# Altium PCB sedraPasaAltos.PcbDoc
Units mm, origin at the board's own origin, x right, y up, seen from the top; angles counter-clockwise.
Board outline 100.08 x 50 mm, 2 copper layers (Top Layer, Bottom Layer); 37 components, 24 nets, 93 pads, 9 vias.
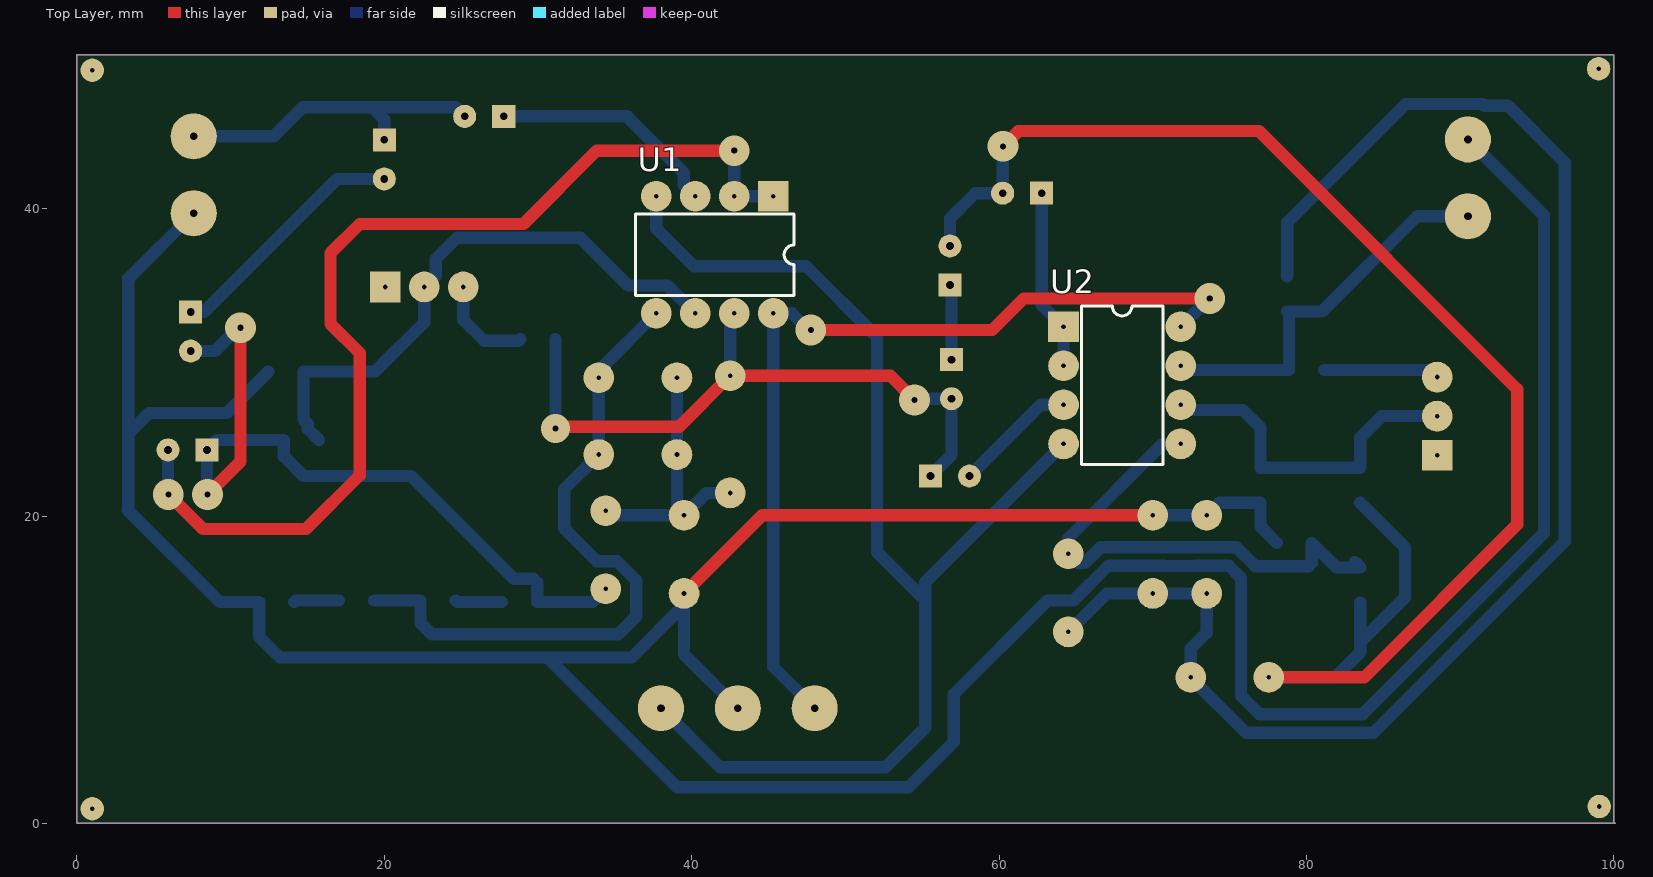
[diagram p0: Top Layer view]
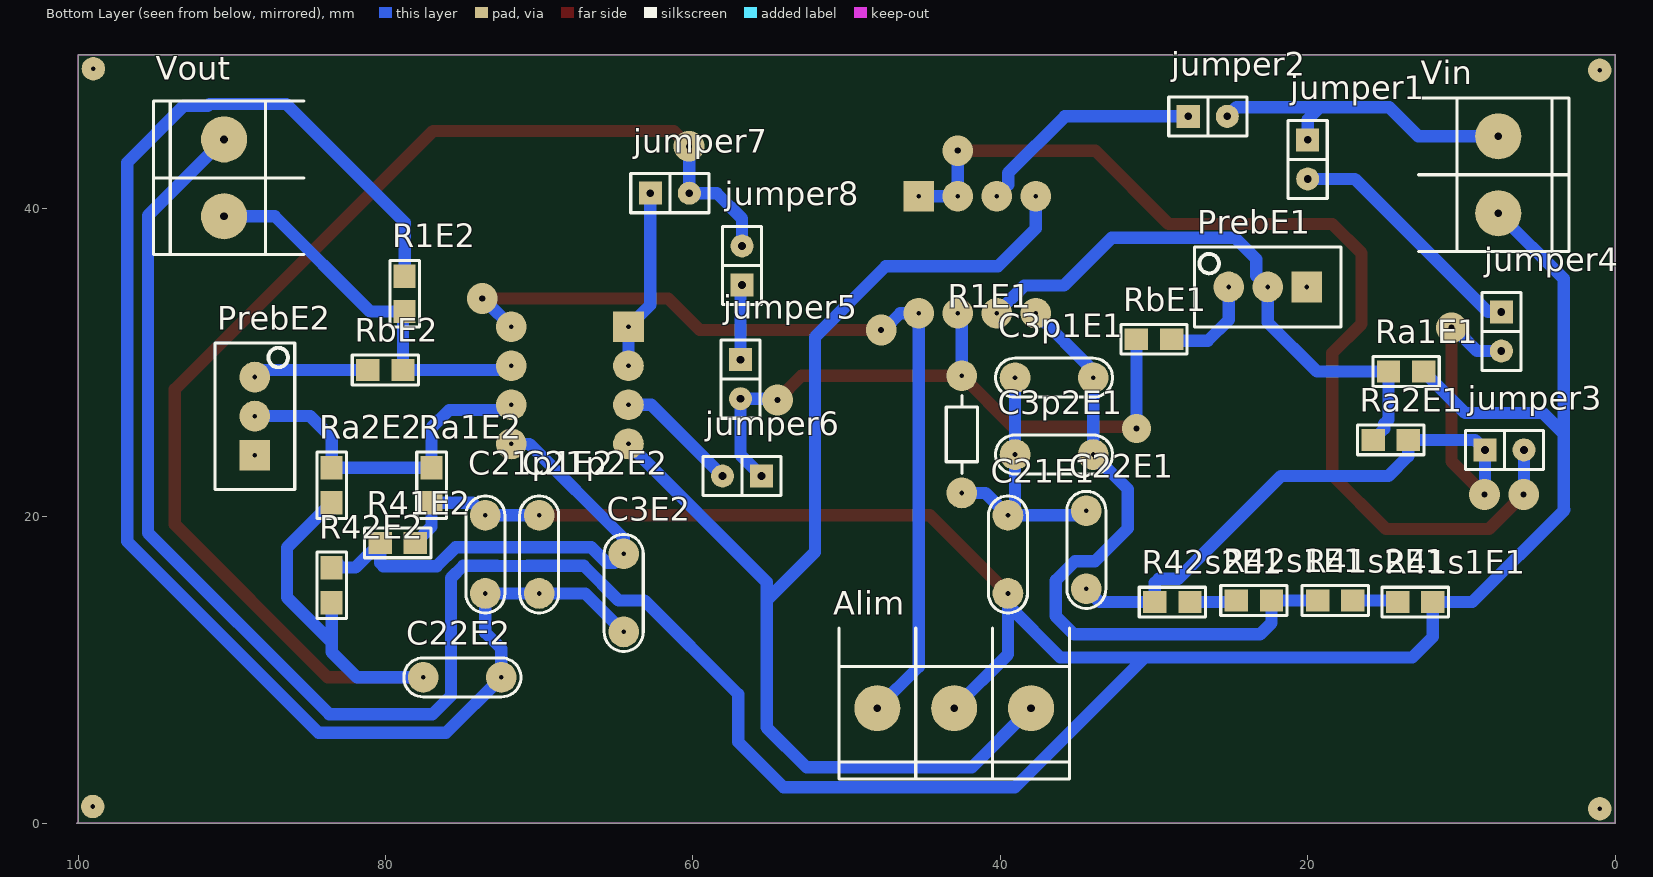
[diagram p1: Bottom Layer view, seen from below]
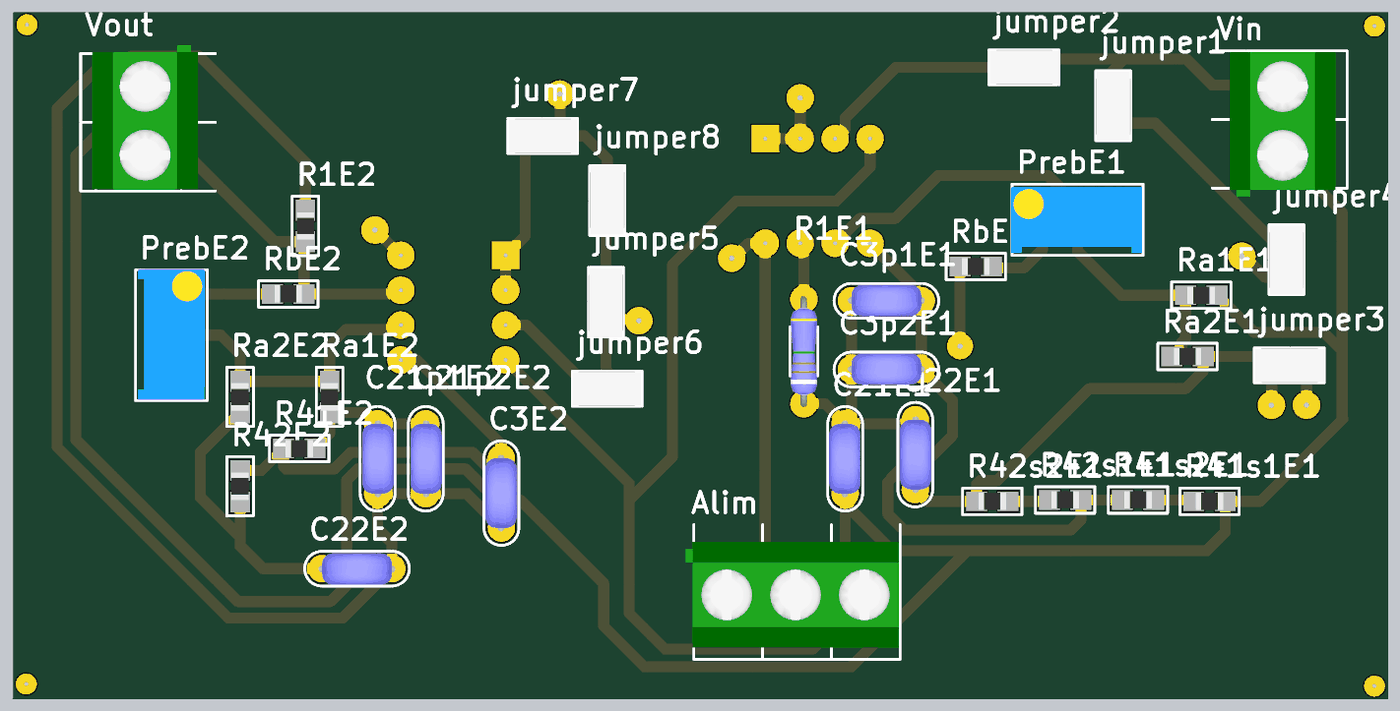
[diagram p2: 3D render of the assembled board from below, using the file's embedded part models]

## Layer stack, top to bottom
Top Solder: solder mask 0.0102, Solder Resist, Dk 3.5
Top Layer: signal copper 0.0356
Dielectric 1: dielectric 0.32, FR-4, Dk 4.8
Bottom Layer: signal copper 0.0356
Bottom Solder: solder mask 0.0102, Solder Resist, Dk 3.5

## Board outline
100.076,0 100,0.076 100,50 0,50 0,0

## Design rules (kind name [scope] priority, off if disabled: settings)
Clearance [All] p1: gap=0.4 ignorepadtopadclearanceinfootprint=FALSE
PolygonConnect [All] p1: connectstyle=Relief reliefconductorwidth=0.254 reliefentries=4 polygonreliefangle="90 Angle" airgapwidth=0.254
RoutingVias [All] p1: holewidth=0.4 width=1.9 viastyle="Through Hole" minholewidth=0.3 minwidth=1 maxholewidth=0.5 maxwidth=2
SolderMaskExpansion [All] p1: expansion=0.102
Width [All] p1: maxlimit=0.9 minlimit=0.75 preferedwidth=0.8
30 further rules are at their usual default settings.

## Classes and differential pairs
component class sedraPasaAltos: Alim C3E2 C3p1E1 C3p2E1 C21E1 C21p1E2 C21p2E2 C22E1 C22E2 jumper1 jumper2 jumper3 jumper4 jumper5 jumper6 jumper7 jumper8 PrebE1 PrebE2 R1E1 R1E2 R41E2 R41s1E1 R41s2E1 R42E2 R42s1E1 R42s2E1 Ra1E1 Ra1E2 Ra2E1 Ra2E2 RbE1 RbE2 Vin Vout

## Components (designator, comment, footprint, x,y, rotation, side; value= is the part's Value field where it differs from the comment)
Alim "BORNERA 3" BORNERA3 43,7.5 r90 bottom
C3E2 "CAP" CAP200 64.5,15 r270 bottom
C3p1E1 "CAP" CAP200 36.5,29 r0 bottom
C3p2E1 "CAP" CAP200 36.5,24 r0 bottom
C21E1 "CAP" CAP200 39.5,17.5 r270 bottom
C21p1E2 "CAP" CAP200 73.5,17.5 r90 bottom
C21p2E2 "CAP" CAP200 70,17.5 r90 bottom
C22E1 "CAP" CAP200 34.4,17.8 r90 bottom
C22E2 "CAP" CAP200 75,9.5 r180 bottom
jumper1 "JUMPER" JUMPER2 20,43.2 r270 bottom
jumper2 "JUMPER" JUMPER2 26.5,46 r180 bottom
jumper3 "JUMPER" JUMPER2 7.2,24.3 r180 bottom
jumper4 "JUMPER" JUMPER2 7.4,32 r270 bottom
jumper5 "JUMPER" JUMPER2 56.9,28.9 r270 bottom
jumper6 "JUMPER" JUMPER2 56.8,22.6 r0 bottom
jumper7 "JUMPER" JUMPER2 61.5,41 r180 bottom
jumper8 "JUMPER" JUMPER2 56.8,36.3 r90 bottom
PrebE1 "PRESET" "PRESET V" 22.6,34.9 r0 bottom
PrebE2 "PRESET" "PRESET V" 88.5,26.5 r90 bottom
R1E1 "RES" RES300 42.5,21.5 r90 bottom
R1E2 "RES" 0805 78.75,34.45 r270 bottom
R41E2 "RES" 0805 79.2,18.25 r0 bottom
R41s1E1 "RES" 0805 13,14.4 r0 bottom
R41s2E1 "RES" 0805 18.2,14.5 r0 bottom
R42E2 "RES" 0805 83.5,15.5 r90 bottom
R42s1E1 "RES" 0805 23.5,14.5 r180 bottom
R42s2E1 "RES" 0805 28.8,14.4 r180 bottom
Ra1E1 "RES" 0805 13.6,29.4 r0 bottom
Ra1E2 "RES" 0805 77,22 r90 bottom
Ra2E1 "RES" 0805 14.6,24.95 r0 bottom
Ra2E2 "RES" 0805 83.5,22 r90 bottom
RbE1 "RES" 0805 30,31.5 r0 bottom
RbE2 "RES" 0805 80,29.5 r180 bottom
U1 "TL082JG" JG008 41.5,37 r180 top
U2 "TL082JG" JG008 68,28.5 r270 top
Vin "BORNERA 2" BORNERA2 7.6,42.2 r0 bottom
Vout "BORNERA 2" BORNERA2 90.5,42 r180 bottom

## Footprints (in the part's own frame and the unit in brackets; to place one, negate y for a bottom-side part, rotate by r counter-clockwise, add the part's x,y. Pads: shape width x height; smd on the part's side, far side on the other; paste and mask are expansions set on the pad)
0805 [mil] "Pasivo 0805"
  rect 60x56 smd: 1(-45,0) 2(45,0)
  silkscreen extent -85,-38 85,38, body extent -40,-24 39,25, height 15
BORNERA2 [mm] "Bornera con Tornillos 5mm separación"
  round 3 / inner round 3.75 / far side round 3 hole 0.5: 1(0,2.5) 2(0,-2.5)
  silkscreen extent -4.6,-5 5.2,5, body extent -3.76,-4.89 3.94,5.61, height 10
BORNERA3 [mm] "Bornera con Tornillos 5mm separación"
  round 3 / inner round 3.75 / far side round 3 hole 0.5: 1(0,5) 2(0,0) 3(0,-5)
  silkscreen extent -4.6,-7.5 5.2,7.5, body extent -3.76,-7.39 3.94,8.11, height 10.05
CAP200 [mm]
  round 2 hole 0.3: 1(-2.54,0) 2(2.54,0)
  silkscreen extent -3.81,-1.27 3.81,1.27, body extent -2.79,-1.17 2.79,1.12, height 6.24
JG008 [mm] "DIP; 8 Leads; Row Spacing 7.62 mm; Pitch 2.54 mm"
  rect 2x2 hole 0.3: 1(-3.81,-3.81)
  round 2 hole 0.3: 2(-1.27,-3.81) 3(1.27,-3.81) 4(3.81,-3.81) 5(3.81,3.81) 6(1.27,3.81) 7(-1.27,3.81) 8(-3.81,3.81)
  silkscreen extent -5.15,-2.65 5.15,2.65
JUMPER2 [mm]
  rect 1.5x1.5 hole 0.5: 1(-1.27,0)
  round 1.5 hole 0.5: 2(1.27,0)
  silkscreen extent -2.54,-1.27 2.54,1.27, body extent -2.46,-1.27 2.54,1.27, height 9.5
"PRESET V" [mm]
  rect 2x2 hole 0.3: 1(-2.54,0)
  round 2 hole 0.3: 2(0,0) 3(2.54,0)
  silkscreen extent -4.76,-2.6 4.76,2.6, body extent -4.7,-2.42 4.83,2.42, height 11.55
RES300 [mm]
  round 2 hole 0.3: 1(0,0) 2(7.62,0)
  silkscreen extent 1.27,-1.02 6.35,1.02, body extent -0.25,-0.97 7.87,0.97, height 2.01

## Part data
U1 U2: "JFET-Input Operational Amplifier", ComponentLink1Description="Manufacturer Link", ComponentLink1URL=http://www.ti.com/, ComponentLink2Description=Datasheet, ComponentLink2URL=http://www-s.ti.com/sc/ds/tl082.pdf, DatasheetVersion=Feb-1999, LatestRevisionDate=04-Mar-2005, LatestRevisionNote="Stylized 3D Model Added.", PackageDescription="DIP; 8 Leads; Row Spacing 7.62 mm; Pitch 2.54 mm", PackageReference=JG008, PackageVersion=Jan-1995, Published=16-Jan-2001, Publisher="Altium Limited"

## Free pads (board coordinates)
  round 1.524 hole 0.3: 3(1,49) 4(99,49.1) 5(99.05,1.1) 6(1,0.95)

## Via types
v1: diameter 2, hole 0.4, Top Layer to Bottom Layer, 8 vias
v2: diameter 1.9, hole 0.4, Top Layer to Bottom Layer, 1 vias

## Nets (pads, with @x,y where several pads share a name; then routed paths per layer and width w, separated by ;. In a path a pad name is that pad's centre, name@x,y a point inside that pad or via, vN(x,y) a via of type N, cw(c..) or ccw(c..) an arc to the next point about the centre after c; other vN are vias at no path point)
+VCC: Alim.1 U1.8 U2.8 | length 58.5
  Top Layer w0.8: v1(47.75,32.1) 59.55,32.1 61.6,34.15 v1(73.7,34.15)
  Bottom Layer w0.8: v1@47.5,32.2 46.51,33.19 U1.8 45.31,10.19 Alim.1 ; U2.8 v1@73.4,33.9
-VCC: Alim.3 U1.4 U2.4 | length 79.9
  Bottom Layer w0.8: U1.4 37.69,38.71 40.15,36.25 47.45,36.25 52.05,31.65 52.05,17.65 55.2,14.5 ; Alim.3 41.85,3.65 52.6,3.65 55.2,6.25 55.2,14.5 ; U2.4 55.2,15.7 55.2,14.5
GND: Alim.2 C21E1.2 C21p1E2.2 C21p2E2.2 R41E2.1 R41s1E1.1 Ra1E1.1 Ra1E2.1 Vin.1 Vout.1 | length 243.8
  Top Layer w0.8: C21E1.2 44.58,20.04 C21p2E2.2
  Bottom Layer w0.8: Vin.1 3.35,35.45 3.35,25.35 ; Ra1E1.1 9.757,26.7 4.7,26.7 3.35,25.35 ; C21E1.2 C21E1.2@39.5,14.2 ; Alim.2 39.5,11 C21E1.2@39.5,14.2 ; C21p2E2.2 C21p1E2.2 74.317,20.857 Ra1E2.1 77,19.307 R41E2.1 ; Vout.1 95.45,39.55 95.45,18.9 83.65,7.1 76.95,7.1 75.74,8.31 75.74,15.96 74.94,16.76 72.754,16.76 72.744,16.75 70.756,16.75 70.746,16.76 67.103,16.76 64.843,14.5 63.15,14.5 57.05,8.4 57.05,5.3 54.1,2.35 39.05,2.35 30.6,10.8 ; 3.35,25.35 3.35,20.45 3.3,20.4 9.3,14.4 R41s1E1.1 11.857,12.143 13.2,10.8 30.6,10.8 ; 30.6,10.8 36.1,10.8 C21E1.2@39.5,14.2
NetC3E2_1: C3E2.1 R41E2.2 R42E2.2 U2.5 | length 33.6
  Bottom Layer w0.8: U2.5 70.64,24.69 64.5,18.55 C3E2.1 65.097,16.943 65.589,16.943 66.606,17.96 75.437,17.96 76.658,16.739 80.139,16.739 80.343,16.943 R41E2.2 81.95,16.643 R42E2.2 R42E2.2@83.143,17
NetC3E2_2: C3E2.2 C21p1E2.1 C21p2E2.1 C22E2.2 R1E2.1 | length 97.9
  Bottom Layer w0.8: C3E2.2 67,14.96 C21p2E2.1 C21p1E2.1 73.5,12.4 72.46,11.36 C22E2.2 76.06,5.9 84.35,5.9 96.8,18.35 96.8,43 93.1,46.7 91.553,46.7 91.453,46.8 86.45,46.8 78.75,39.1 R1E2.1
NetC3p1E1_1: C3p1E1.1 C3p2E1.1 R41s2E1.2 R42s1E1.2 U1.5 | length 44.2
  Bottom Layer w0.8: R41s2E1.2 R42s1E1.2 22.357,13.043 23.1,12.3 35.2,12.3 36.4,13.5 36.4,15.8 36.2,16 36.2,16.006 35.146,17.06 33.84,17.06 31.7,19.2 31.7,21.74 C3p2E1.1 C3p1E1.1 33.96,29.46 U1.5
NetC3p1E1_2: C3p1E1.2 C3p2E1.2 C21E1.1 C22E1.2 R1E1.1 | length 18
  Bottom Layer w0.8: C22E1.2 34.7,20.04 C21E1.1 ; C3p1E1.2 C3p2E1.2 39.04,20.5 C21E1.1 ; R1E1.1 40.96,21.5 C21E1.1
NetC22E1_1: C22E1.1 jumper3.1 jumper4.2 R42s2E1.1 Ra2E1.1 | length 50.1
  Top Layer w0.8: v1(8.5,21.4) 10.65,23.55 v1(10.65,32.25)
  Bottom Layer w0.8: jumper4.2 8.98,30.73 v1@10.35,32.1 ; v1@8.47,21.73 jumper3.1 9.12,24.95 Ra2E1.1 13.457,23.893 14.75,22.6 21.743,22.6 28.432,15.911 29.689,15.911 29.943,15.657 R42s2E1.1 33.54,14.4 C22E1.1
NetC22E2_1: C22E2.1 jumper7.2 jumper8.2 R42E2.1 Ra2E2.1 | length 99.9
  Top Layer w0.8: jumper7.2 jumper7.2@60.23,41.091 ; v1(60.25,44.05) 61.25,45.05 76.9,45.05 93.7,28.25 93.7,19.45 83.75,9.5 C22E2.1
  Bottom Layer w0.8: jumper8.2 56.8,39.35 58.45,41 jumper7.2 v1@60.23,43.68 ; C22E2.1 81.85,9.5 83.5,11.15 83.5,11.8 ; R42E2.1 83.5,11.8 ; Ra2E2.1 86.4,17.957 86.4,14.7 83.5,11.8
Netjumper1_1: jumper1.1 jumper2.2 Vin.2 | length 21.4
  Bottom Layer w0.8: Vin.2 12.8,44.7 14.7,46.6 19.2,46.6 ; jumper1.1 20,45.8 19.2,46.6 ; jumper2.2@25.03,45.8 jumper2.2 24.63,46.6 19.2,46.6
Netjumper2_1: jumper2.1 U1.3 | length 15.1
  Bottom Layer w0.8: jumper2.1 35.8,46 39.49,42.31 39.49,41.55 U1.3
Netjumper5_1: jumper5.1 jumper8.1 | length 4.9
  Bottom Layer w0.8: jumper8.1 56.9,34.93 jumper5.1
Netjumper5_2: jumper5.2 jumper6.1 R1E1.2 RbE1.2 U1.7 | length 43
  Top Layer w0.8: v2(31.143,25.693) 31.25,25.8 39.18,25.8 R1E1.2 52.93,29.12 v1(54.5,27.55)
  Bottom Layer w0.8: v2(31.143,25.693) RbE1.2 ; R1E1.2 42.5,32.92 U1.7 ; v1@54.87,27.63 jumper5.2 56.9,23.97 jumper6.1
Netjumper6_2: jumper6.2 U2.3 | length 8
  Bottom Layer w0.8: jumper6.2 62.7,27.23 U2.3
Netjumper7_1: jumper7.1 U2.1 U2.2 | length 11.8
  Bottom Layer w0.8: jumper7.1 62.77,33.73 U2.1 U2.2
NetPrebE1_2: PrebE1.2 Ra1E1.2 Ra2E1.2 U1.6 | length 38
  Bottom Layer w0.8: Ra2E1.2 15.019,25.674 15.019,25.993 14.743,26.269 Ra1E1.2 19.4,29.4 22.6,32.6 PrebE1.2 23.34,35.64 23.34,36.7 24.75,38.11 32.74,38.11 35.86,34.99 38.436,34.99 40.23,33.196 U1.6
NetPrebE1_3: PrebE1.3 RbE1.1 | length 6.5
  Bottom Layer w0.8: PrebE1.3 25.14,32.76 26.5,31.4 28.757,31.4 RbE1.1
NetPrebE2_2: PrebE2.2 Ra1E2.2 Ra2E2.2 U2.6 | length 22.4
  Bottom Layer w0.8: U2.6 72.14,26.9 75.85,26.9 77,25.75 Ra1E2.2 Ra2E2.2 83.5,25.1 84.9,26.5 PrebE2.2
NetPrebE2_3: PrebE2.3 RbE2.1 | length 7.5
  Bottom Layer w0.8: RbE2.1 88.04,29.5 PrebE2.3
NetR1E2_2: R1E2.2 RbE2.2 U2.7 Vout.2 | length 25.3
  Bottom Layer w0.8: U2.7 72.08,29.5 RbE2.2 78.857,33.2 R1E2.2 81.007,33.307 87.2,39.5 Vout.2
NetR41s1E1_2: R41s1E1.2 R41s2E1.1 | length 3
  Bottom Layer w0.8: R41s1E1.2 14.243,14.5 R41s2E1.1
NetR42s1E1_1: R42s1E1.1 R42s2E1.2 | length 3.1
  Bottom Layer w0.8: R42s1E1.1 24.743,14.4 R42s2E1.2
VinBuffered: jumper3.2 U1.1 U1.2 | length 67.2
  Top Layer w0.8: v1(5.95,21.4) 8.2,19.15 14.9,19.15 18.4,22.65 18.4,30.6 16.5,32.5 16.5,37.1 18.4,39 29.05,39 33.82,43.77 v1(42.77,43.77)
  Bottom Layer w0.8: v1@5.93,21.67 jumper3.2 ; v1(42.77,43.77) U1.2 U1.1
VinSinBuff: jumper1.2 jumper4.1 | length 16.3
  Bottom Layer w0.8: jumper4.1@7.33,33.27 jumper4.1 8.27,33.27 16.93,41.93 jumper1.2 jumper1.2@20,42
pads on no net: PrebE1.1 PrebE2.1

## Keep-outs
Keep-Out Layer:
  the board outline again, w0.1